# Altium PCB temperature_controller.PcbDoc
Units mm, origin at the board's own origin, x right, y up, seen from the top; angles counter-clockwise.
Board outline 47 x 53 mm, 2 copper layers (Top Layer, Bottom Layer); 94 components, 44 nets, 284 pads, 137 vias.
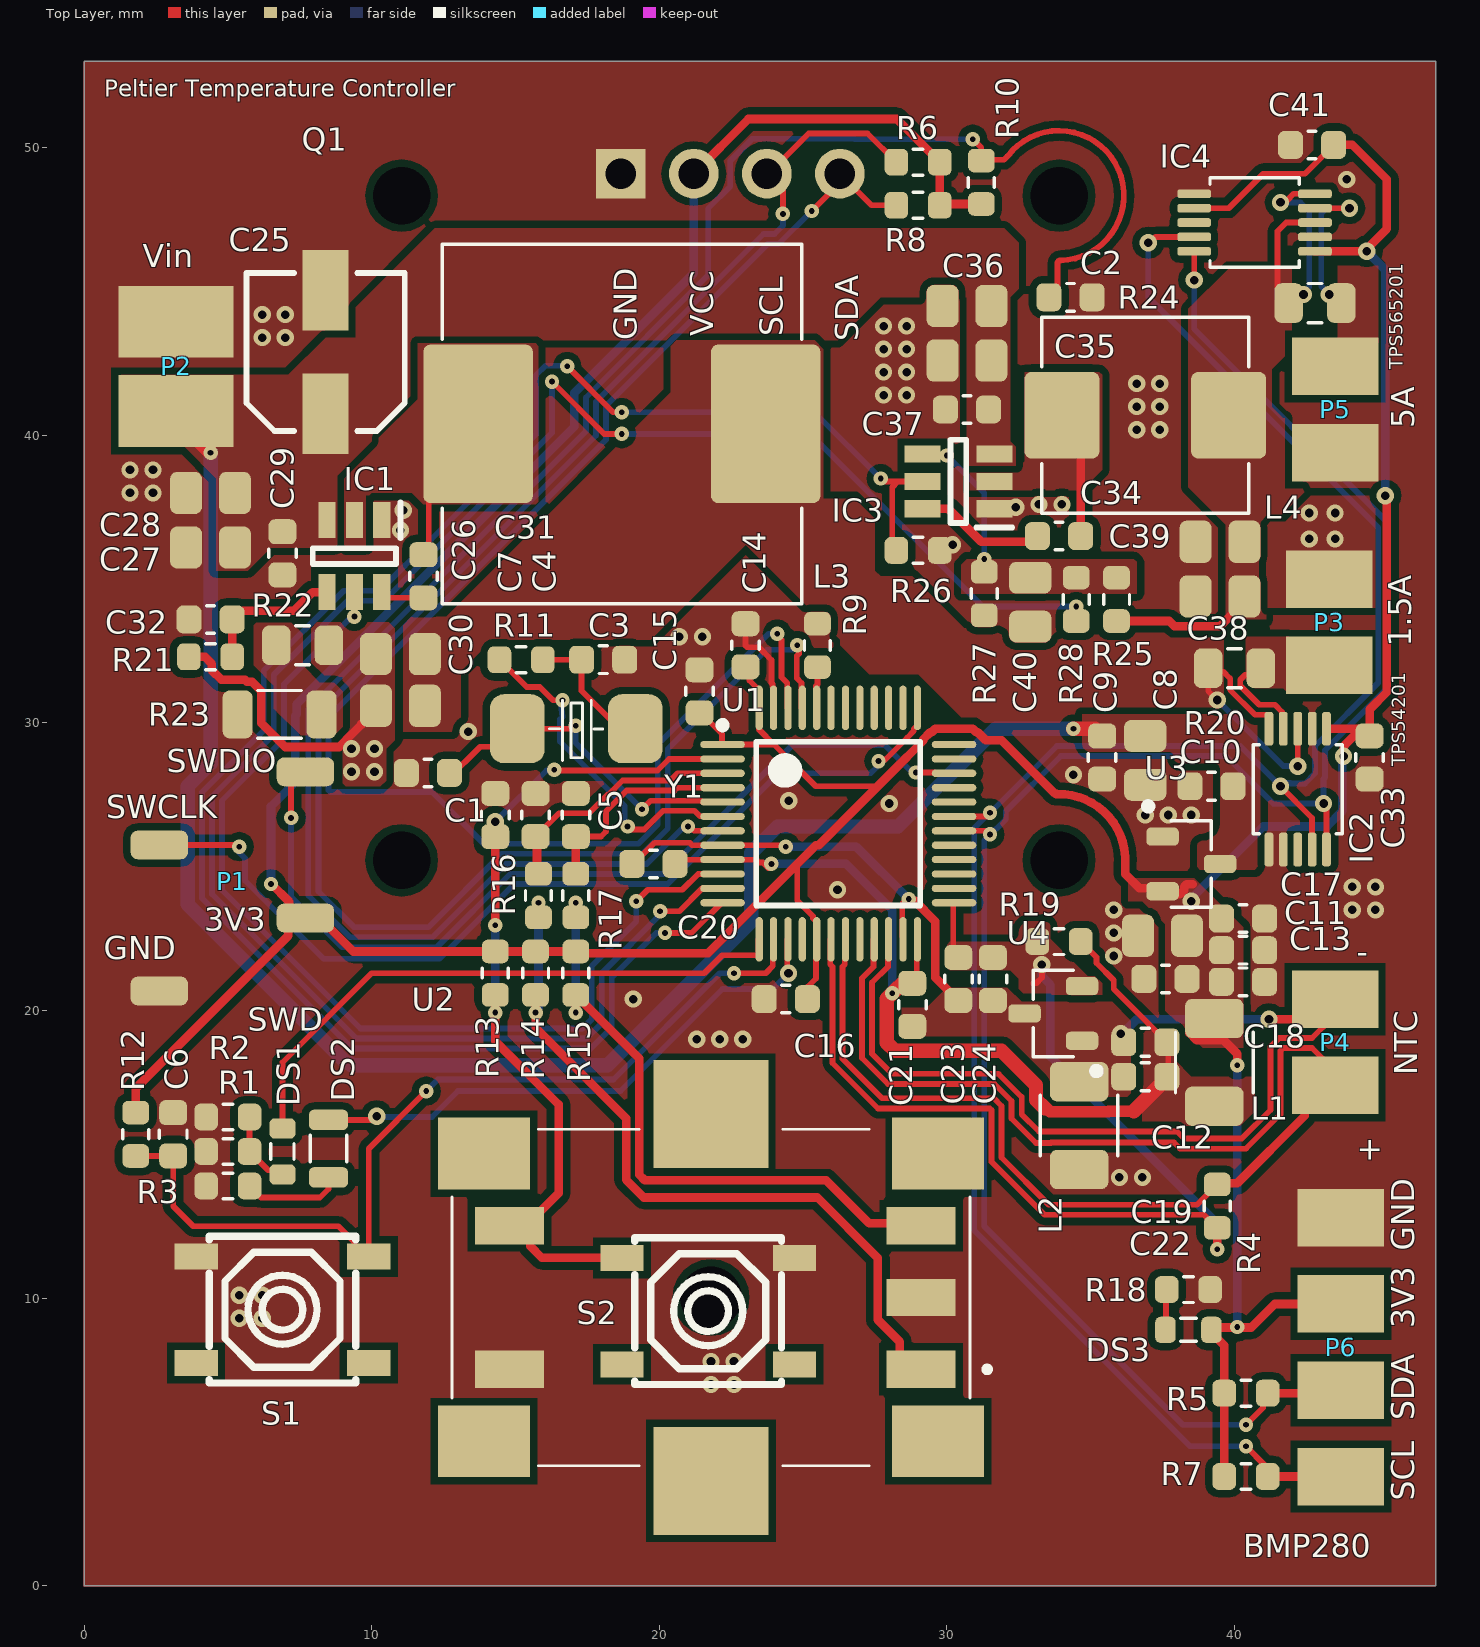
[diagram p0: Top Layer view]
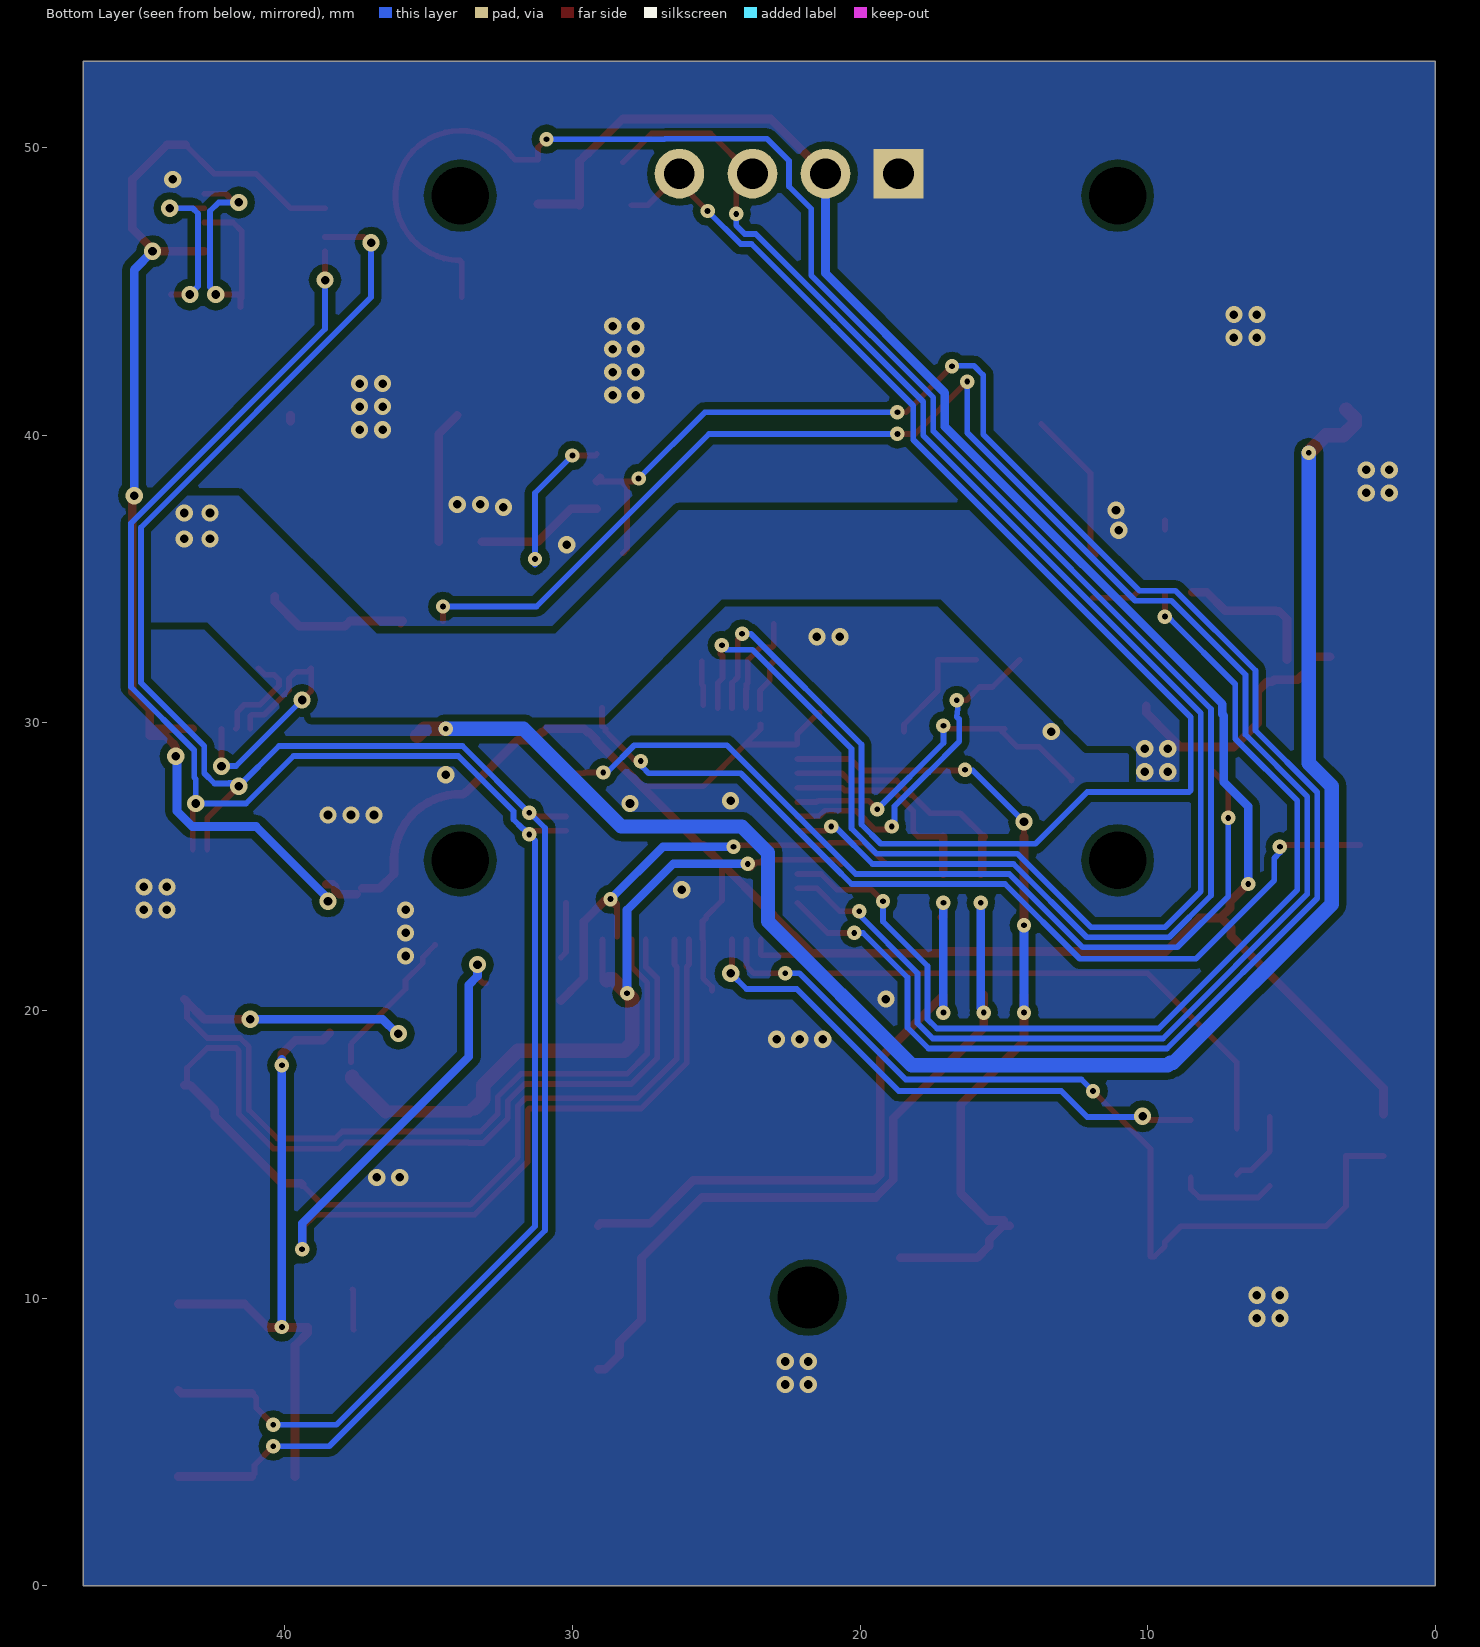
[diagram p1: Bottom Layer view, seen from below]

## Layer stack, top to bottom
Top Solder: solder mask 0.0102, Solder Resist, Dk 3.5
Top Layer: signal copper 0.0356
Dielectric 1: dielectric 0.32, FR-4, Dk 4.8
Bottom Layer: signal copper 0.0356
Bottom Solder: solder mask 0.0102, Solder Resist, Dk 3.5

## Board outline
0,0 0,53 47,53 47,0

## Design rules (kind name [scope] priority, off if disabled: settings)
Clearance [All] p1: gap=0.25 ignorepadtopadclearanceinfootprint=FALSE except(0: Arc-Hole Track-Hole SMDPad-Hole THPad-Hole Via-Hole Fill-Hole Poly-Hole Region-Hole Text-Hole; 0.15: Arc-Arc Arc-Track Arc-SMDPad Track-Track Track-SMDPad; 0.2: Arc-Via Track-Via SMDPad-SMDPad; 0.5: THPad-THPad)
HoleSize [All] p1: absolutevalues=TRUE maxlimit=6.3 minlimit=0.2 maxpercent=80.000 minpercent=20.000
MinimumAnnularRing [All] p1: minimumring=0.13
MinimumSolderMaskSliver [All] p1 off: minsoldermaskwidth=0.254
PolygonConnect [All] p1: connectstyle=Direct reliefconductorwidth=0.254 reliefentries=4 polygonreliefangle="90 Angle" airgapwidth=0.254
RoutingVias [All] p1: holewidth=0.3 width=0.6 viastyle="Through Hole" minholewidth=0.2 minwidth=0.45 maxholewidth=6.3 maxwidth=6.7
SilkToSilkClearance [All] p1: silktosilkclearance=0.15
SilkToSolderMaskClearance [IsPad] p1: minsilkscreentomaskgap=0.15 clearancetoexposedcopper=TRUE
SolderMaskExpansion [All] p1: expansion=0.102 istentingtop=FALSE useseparateexpansions=TRUE expansionbottom=0.102 istentingbottom=TRUE
Width [All] p1: maxlimit=5 minlimit=0.15 preferedwidth=0.3 minimp=50.000000 maximp=50.000000 favimp=50.000000
26 further rules are at their usual default settings.

## Components (designator, comment, footprint, x,y, rotation, side; value= is the part's Value field where it differs from the comment)
C1 "20pf" CAPC160X80X90L35N 11.956,28.263 r180 top
C2 "100nF" CAPC160X80X90L35N 34.3,44.8 r0 top
C3 "20pf" CAPC160X80X90L35N 18.05,32.2 r0 top
C4 "10nF" CAPC160X80X90L35N 15.7,26.8 r90 top
C5 "10nF" CAPC160X80X90L35N 17.1,26.8 r90 top
C6 "10nF" CAPC160X80X90L35N 3.1,15.7 r90 top
C7 "10nF" CAPC160X80X90L35N 14.3,26.8 r90 top
C8 "22uF" CAPC200X125X110L50N 36.9,28.7 r270 top
C9 "1uF" CAPC160X80X90L35N 35.4,28.8 r270 top
C10 "100nF" CAPC160X80X90L35N 39.2,27.8 r180 top
C11 "100nF" CAPC160X80X90L35N 40.3,22.1 r0 top
C12 "1uF" CAPC160X80X90L35N 37.6,21.1 r180 top
C13 "22uF" CAPC200X125X110L50N 37.5,22.6 r180 top
C14 "100nF" CAPC160X80X90L35N 23,32.7 r90 top
C15 "100nF" CAPC160X80X90L35N 21.4,31.1 r90 top
C16 "100nF" CAPC160X80X90L35N 24.4,20.4 r180 top
C17 "10nF" CAPC160X80X90L35N 40.3,23.2 r0 top
C18 "100nF" CAPC160X80X90L35N 40.3,21 r0 top
C19 "1uF" CAPC160X80X90L35N 36.9,18.9 r180 top
C20 "100nF" CAPC160X80X90L35N 19.8,25.1 r180 top
C21 "100nF" CAPC160X80X90L35N 28.8,20.2 r270 top
C22 "10nF" CAPC160X80X90L35N 36.9,17.7 r180 top
C23 "1uF" CAPC160X80X90L35N 30.4,21.1 r270 top
C24 "10nF" CAPC160X80X90L35N 31.6,21.1 r270 top
C25 "#NAME?" PNSC-FP-V-C_V 8.4,42.9 r90 top value=22uF
C26 "100nF" CAPC160X80X90L35N 11.8,35.1 r90 top
C27 "22uF" CAPC200X125X110L50N 4.4,36.1 r180 top
C28 "10uF" CAPC200X125X110L50N 4.4,38 r180 top
C29 "100nF" CAPC160X80X90L35N 6.9,35.9 r270 top
C30 "22uF" CAPC200X125X110L50N 11,32.4 r180 top
C31 "22uF" CAPC200X125X110L50N 11,30.6 r180 top
C32 "100nF" CAPC160X80X90L35N 4.4,33.6 r0 top
C33 "100nF" CAPC160X80X90L35N 44.7,28.8 r270 top
C34 "100nF" CAPC160X80X90L35N 33.9,36.5 r0 top
C35 "22uF" CAPC200X125X110L50N 30.7,42.6 r180 top
C36 "10uF" CAPC200X125X110L50N 30.7,44.5 r180 top
C37 "100nF" CAPC160X80X90L35N 30.7,40.9 r180 top
C38 "22uF" CAPC200X125X110L50N 39.5,34.4 r180 top
C39 "22uF" CAPC200X125X110L50N 39.5,36.3 r180 top
C40 "22uF" CAPC200X125X110L50N 32.9,34.2 r90 top
C41 "100nF" CAPC160X80X90L35N 42.7,50.1 r180 top
DS1 "19-217/GHC-YR1S2/3T" LEDC160X80X60L30N 6.9,15.1 r90 top
DS2 "FC-2012HRK-620D" LEDC200X125X110L30N 8.5,15.2 r90 top
DS3 "19-217/GHC-YR1S2/3T" LEDC160X80X60L30N 38.4,8.9 r0 top
IC1 "TPS54201DDCR" SOT95P280X110-6N 9.4,35.8 r270 top
IC2 "INA226AIDGSR" SOP10P50_300X490X110L55X22N 42.2,27.7 r0 top
IC3 "TPS565201DDCR" SOT95P280X110-6N 30.4,38.4 r180 top
IC4 "INA226AIDGSR" SOP10P50_300X490X110L55X22N 40.7,47.4 r270 top
L1 "100uH" INDM320X250X240L55X190N 39.3,18.2 r270 top
L2 "100uH" INDM320X250X240L55X190N 34.6,16 r90 top
L3 "68uH" INDM1250X1250X800L290X540N 18.7,40.4 r0 top
L4 "3.3uH" INDM730X660X300L160X290N 36.9,40.7 r0 top
P1 "SWD" SWD 2.62,20.68 r0 top
P2 "TWO PADS" "TWO PADS - medium" 3.2,42.4 r0 top value=1uF
P3 "TWO PADS for TEC" "TWO PADS" 43.3,32 r180 top value=1uF
P4 "NTC" "TWO PADS" 43.5,20.4 r0 top value=1uF
P5 "TWO PADS for TEC" "TWO PADS" 43.5,42.4 r0 top value=1uF
P6 "PADS for BMP" "FOUR PADS" 43.7,12.8 r0 top value=1uF
Q1 "SSD1306 OLED_big" "SSD1306 OLED" 18.66,49.1 r0 top
R1 "180" RESC160X80X90L30N 5,15.1 r0 top
R2 "180" RESC160X80X90L30N 5,16.3 r0 top
R3 "180" RESC160X80X90L30N 5,13.9 r0 top
R4 "10k" RESC160X80X90L30N 39.4,13.2 r270 top
R5 "1.8k" RESC160X80X90L30N 40.4,6.7 r0 top
R6 "1.8k" RESC160X80X90L30N 29,49.5 r0 top
R7 "1.8k" RESC160X80X90L30N 40.4,3.8 r0 top
R8 "1.8k" RESC160X80X90L30N 29,48 r0 top
R9 "10k" RESC160X80X90L30N 25.5,32.7 r90 top
R10 "10k" RESC160X80X90L30N 31.2,48.8 r270 top
R11 "180" RESC160X80X90L30N 15.2,32.2 r0 top
R12 "10k" RESC160X80X90L30N 1.8,15.7 r270 top
R13 "10k" RESC160X80X90L30N 14.3,21.3 r270 top
R14 "10k" RESC160X80X90L30N 15.7,21.3 r270 top
R15 "10k" RESC160X80X90L30N 17.1,21.3 r270 top
R16 "10k" RESC160X80X90L30N 15.8,24 r90 top
R17 "10k" RESC160X80X90L30N 17.1,24 r90 top
R18 "180" RESC160X80X90L30N 38.4,10.3 r180 top
R19 "10k" RESC160X80X90L30N 33.9,22.4 r0 top
R20 "0.033" RESC200X125X70L40N 40,31.9 r0 top
R21 "820" RESC160X80X90L30N 4.4,32.3 r180 top
R22 "0.033" RESC200X125X70L40N 7.6,32.7 r0 top
R23 "0.1" RESC310X152X65L45N 6.8,30.3 r0 top
R24 "0.01" RESC200X125X70L40N 42.8,44.6 r0 top
R25 "75k" RESC160X80X90L30N 35.9,34.3 r90 top
R26 "10k" RESC160X80X90L30N 29,36 r0 top
R27 "10k" RESC160X80X90L30N 31.3,34.5 r90 top
R28 "10k" RESC160X80X90L30N 34.5,34.3 r270 top
S1 "Switch" "Tactile switch" 6.9,9.6 r0 top
S2 "Switch" "Tactile switch" 21.7,9.55 r0 top
U1 "STM32F373CCT6" STM-LQFP48_L 26.225,26.5 r270 top
U2 "EC11J0924411" EC11J0924411 21.8,10.025 r90 top
U3 "MCP1703AT-3302E/CB" SOT-23A-CB3_M 38.5,25.1 r180 top
U4 "LM4041C12IDBZR" SOT-23A-CB3_M 33.7,19.9 r0 top
Y1 "8Mhz" 5032 17.1,29.8 r0 top

## Footprints (in the part's own frame and the unit in brackets; to place one, negate y for a bottom-side part, rotate by r counter-clockwise, add the part's x,y. Pads: shape width x height; smd on the part's side, far side on the other; paste and mask are expansions set on the pad)
5032 [mm]
  rrect50% 1.9x2.4 smd: 1(-2.032,0) 2(2.068,0)
  silkscreen extent -0.92,-1.11 0.94,0.99
CAPC160X80X90L35N [mm] "Capacitor, Chip; 1.60 mm L X 0.80 mm W X 0.90 mm H body"
  rrect51% 0.87x0.97 smd: 1(-0.75,0) 2(0.75,0)
  silkscreen extent -0.14,-0.48 0.14,0.48, body extent -0.8,-0.4 0.8,0.4, height 0.9
CAPC200X125X110L50N [mm] "Capacitor, Chip; 2.00 mm L X 1.25 mm W X 1.10 mm H body"
  rrect45% 1.11x1.47 smd: 1(-0.85,0) 2(0.85,0)
  body extent -1,-0.62 1,0.63, height 1.1
EC11J0924411 [mm]
  round 1.075 hole 2.15 unplated: 6(0,0)
  rect 2.5x3.2 smd: 7(-5,-7.9) 8(5,-7.9) 9(5,7.9) 10(-5,7.9)
  rect 3.75x4 smd: 11(-6.375,0) 12(6.375,0)
  rect 1.3x2.4 smd: A1(-2.5,-7.3) B1(2.5,-7.3) C1(0,-7.3) D1(-2.5,7) E1(2.5,7)
  silkscreen extent -5.85,-9.7 5.85,9, body extent -7.88,-9.25 7.88,9.25, height 24.6
"FOUR PADS" [mm]
  rect 3x2 smd: 3V3(0,-3) GND(0,0) SCL(0,-6) SDA(0,-9)
INDM320X250X240L55X190N [mm] "Inductor, Molded Body; 2.10 mm L X 2.50 mm W X 2.40 mm H body"
  rrect36% 1.37x2.03 smd: 1(-1.525,0) 2(1.525,0)
  silkscreen extent -1.05,-1.35 1.05,1.35, body extent -1.6,-1.25 1.6,1.25, height 2.4
INDM730X660X300L160X290N [mm] "Inductor, Molded Body; 7.20 mm L X 6.60 mm W X 3.00 mm H body"
  rrect19% 2.61x3.01 smd: 1(-2.9,0) 2(2.9,0)
  silkscreen extent -3.6,-3.4 3.6,3.4, body extent -3.65,-3.3 3.65,3.3, height 3
INDM1250X1250X800L290X540N [mm] "Inductor, Molded Body; 12.50 mm L X 12.50 mm W X 8.00 mm H body"
  rrect13% 3.81x5.51 smd: 1(-5,0) 2(5,0)
  silkscreen extent -6.25,-6.25 6.25,6.25, body extent -6.25,-6.25 6.25,6.25, height 8
LEDC160X80X60L30N [mm] "LED, Chip; 0603; 1.60 mm L X 0.80 mm W X 0.60 mm H body, green"
  rrect51% 0.71x0.91 smd: A(0.8,0) C(-0.8,0)
  silkscreen extent -0.27,-0.4 0.27,0.4, body extent -0.8,-0.4 0.8,0.4, height 0.95
LEDC200X125X110L30N [mm] "LED, Chip; 2.00 mm L X 1.25 mm W X 1.10 mm H body"
  rrect51% 0.71x1.36 smd: A(1,0) C(-1,0)
  silkscreen extent -0.47,-0.63 0.47,0.63, body extent -1,-0.62 1,0.63, height 1.45
PNSC-FP-V-C_V [mm] "CAPAE, 2-Leads, Body 5.50x5.50mm"
  rect 2.8x1.6 smd: 1(-2.15,0) 2(2.15,0)
  silkscreen extent -2.75,-2.75 2.75,2.75, body extent -3.25,-2.75 3.25,2.75, height 6.1
RESC160X80X90L30N [mm] "Resistor, Chip; 1.60 mm L X 0.80 mm W X 0.90 mm H body"
  rrect51% 0.82x0.93 smd: 1(-0.755,0) 2(0.755,0)
  silkscreen extent -0.17,-0.45 0.17,0.45, body extent -0.8,-0.4 0.8,0.4, height 0.9
RESC200X125X70L40N [mm] "Resistor, Chip; 2.00 mm L X 1.25 mm W X 0.70 mm H body"
  rrect51% 0.99x1.38 smd: 1(-0.915,0) 2(0.915,0)
  silkscreen extent -0.24,-0.68 0.24,0.68, body extent -1,-0.62 1,0.63, height 0.7
RESC310X152X65L45N [mm] "Resistor, 1206; Chip; 3.10 mm L X 1.525 mm W X 0.65 mm H body"
  rrect48% 1.05x1.67 smd: 1(-1.46,0) 2(1.46,0)
  silkscreen extent -0.75,-0.83 0.75,0.83, body extent -1.55,-0.76 1.55,0.76, height 0.65
SOP10P50_300X490X110L55X22N [mm] "Small Outline Pkg (SOP), 0.50 mm pitch; 10 pin, 3.00 mm L X 3.00 mm W X 1.10 mm H body"
  rrect53% 0.3x1.17 smd: 1(-1,-2.1) 2(-0.5,-2.1) 3(0,-2.1) 4(0.5,-2.1) 5(1,-2.1) 6(1,2.1) 7(0.5,2.1) 8(0,2.1) 9(-0.5,2.1) 10(-1,2.1)
  silkscreen extent -1.55,-1.55 1.55,1.55, body extent -1.5,-2.45 1.5,2.45, height 1.1
SOT95P280X110-6N [mm]
  rect 1.25x0.6 smd: 1(-1.25,0.95) 2(-1.25,0) 3(-1.25,-0.95) 4(1.25,-0.95) 5(1.25,0) 6(1.25,0.95)
  silkscreen extent -1.88,-1.45 0.28,1.6, body extent -1.4,-1.45 1.4,1.45, height 1.1
SOT-23A-CB3_M [mm]
  rrect51% 1.13x0.63 smd: 1(1,-0.95) 2(1,0.95) 3(-1,0)
  silkscreen extent -0.7,-2.12 1.62,1.5, body extent -1.2,-1.45 1.2,1.45, height 1.1
"SSD1306 OLED" [mil]
  round 75 hole 78.74 unplated: 2(-300,-940) 2(-300,-30) 2(600,-940) 2(600,-30)
  rect 68x68 hole 42: GND(0,0)
  round 68 hole 42: SCL(200,0) SDA(300,0) VCC(100,0)
  body extent -387,-1034 687,60, height 516
STM-LQFP48_L [mm]
  oval 0.25x1.55 smd: 1(-2.75,-4.025) 2(-2.25,-4.025) 3(-1.75,-4.025) 4(-1.25,-4.025) 5(-0.75,-4.025) 6(-0.25,-4.025) 7(0.25,-4.025) 8(0.75,-4.025) 9(1.25,-4.025) 10(1.75,-4.025) 11(2.25,-4.025) 12(2.75,-4.025) 25(2.75,4.025) 26(2.25,4.025) 27(1.75,4.025) 28(1.25,4.025) 29(0.75,4.025) 30(0.25,4.025) 31(-0.25,4.025) 32(-0.75,4.025) 33(-1.25,4.025) 34(-1.75,4.025) 35(-2.25,4.025) 36(-2.75,4.025)
  oval 1.55x0.25 smd: 13(4.025,-2.75) 14(4.025,-2.25) 15(4.025,-1.75) 16(4.025,-1.25) 17(4.025,-0.75) 18(4.025,-0.25) 19(4.025,0.25) 20(4.025,0.75) 21(4.025,1.25) 22(4.025,1.75) 23(4.025,2.25) 24(4.025,2.75) 37(-4.025,2.75) 38(-4.025,2.25) 39(-4.025,1.75) 40(-4.025,1.25) 41(-4.025,0.75) 42(-4.025,0.25) 43(-4.025,-0.25) 44(-4.025,-0.75) 45(-4.025,-1.25) 46(-4.025,-1.75) 47(-4.025,-2.25) 48(-4.025,-2.75)
  silkscreen extent -3.55,-4.15 2.85,2.85, body extent -3.5,-3.5 3.5,3.5, height 1.6
SWD [mm] "SWD PORT"
  rrect50% 2x1 smd: 3V3(5.08,2.54) GND(0,0) SWCLK(0,5.08) SWDIO(5.08,7.62)
"Tactile switch" [mm]
  rect 1.5x0.9 smd: 1(-3,1.85) 2(3,1.85) 3(-3,-1.85) 4(3,-1.85)
  silkscreen extent -2.55,-2.55 2.55,2.55
"TWO PADS" [mm]
  rect 3x2 smd: 1(0,0) 2(0,-3)
"TWO PADS - medium" [mm] "4.00 mm x 2.50 mm, 0.50 mm space"
  rect 4x2.5 smd: 1(0,1.55) 2(0,-1.55)

## Part data
C1 C3: library part capacitor, LCSC Part #=C1648, Part Number=CL10C200JB8NNNC
C2 C10 C11 C14 C15 C16 C18 C20 C21 C26 C29 C32 C33 C34 C37 C41: library part capacitor, LCSC Part #=C14663, Part Number=CC0603KRX7R9BB104
C4 C5 C6 C7 C17 C22 C24: library part capacitor, LCSC Part #=C57112, Part Number=0603B103K500NT
C8 C13 C27 C30 C31 C35 C38 C39 C40: library part capacitor, LCSC Part #=C45783, Part Number=CL21A226MAQNNNE
C9 C12 C19 C23: library part capacitor, LCSC Part #=C15849, Part Number=CL10A105KB8NNNC
C25: library part CMP-2000-06213-1, "Aluminum Electrolytic Capacitor, 22 uF, +/- 20%, 25 V, 2-Pin SMD (Size Code C), -55 to 105 degC, RoHS, Tape and Reel", Capacitance=22µF, Case Size/Dimension=Ø5x5.8mm, ESR (Equivalent Series Resistance)=0.36O, LCSC Part #=C249771, Lifetime@Temperature=2000Hrs@105°C, Manufacturer=Panasonic, Operating Temp Range=-55to+105°C, Operating Temp-Max=105°C, Package Description="2-Pin Electrolytic Aluminum Capacitor, Body 5.3 x 5.3 mm", Package Reference=FP-V-C, Rated Voltage=25V, Ripple Current=240mA, Datasheet URL=http://industrial.panasonic.com/cdbs/www-data/pdf/RDE0000/ABA0000C1184.pdf, Datasheet Version=03/2016, Manufacturer URL=http://www.panasonic.com/, Mounting Technology=SurfaceMount, Package URL=http://industrial.panasonic.com/cdbs/www-data/pdf/RDE0000/DME0000COL48.pdf, Series=FP, Type=Can, Voltage=25V
C28 C36: library part capacitor, LCSC Part #=C15850, Part Number=CL21A106KAYNNNE
DS1 DS3: library part LED, "Green LED", LCSC Part #=C72043, Part Number=19-217/GHC-YR1S2/3T
DS2: library part "RED LED", "Red LED", LCSC Part #=C84256, Package=0805, Part Number=FC-2012HRK-620D
IC1: library part TPS54201DDCR_1, "Integrated Circuit", Manufacturer_Name="Texas Instruments", Mouser2 Part Number=595-TPS54201DDCR, Part Number=TPS54201, Datasheet Link=http://www.ti.com/lit/gpn/TPS54201, Height=1.1mm, Manufacturer_Part_Number=TPS54201DDCR, Mouser2 Price/Stock=https://www.mouser.com/Search/Refine.aspx?Keyword=595-TPS54201DDCR
IC2 IC4: "Integrated Circuit", LCSC Part #=C49851, Manufacturer_Name="Texas Instruments", Mouser2 Part Number=595-INA226AIDGSR, Datasheet Link=https://componentsearchengine.com/Datasheets/1/INA226AIDGSR.pdf, Height=1.1mm, Manufacturer_Part_Number=INA226AIDGSR, Mouser2 Price/Stock=https://www.mouser.com/Search/Refine.aspx?Keyword=595-INA226AIDGSR
IC3: "Integrated Circuit", Manufacturer_Name="Texas Instruments", Datasheet Link=http://www.ti.com/lit/gpn/tps565201, Height=1.1mm, Manufacturer_Part_Number=TPS565201DDCR
L1 L2: library part Inductor, "Inductor", LCSC Part #=C76836, Part Number=NLV32T-101J-PF
L3: library part Inductor, "Inductor", LCSC Part #=C169377, Part Number=SWRB1207S-680MT, Resistance=0.14
L4: library part Inductor, "Inductor", LCSC Part #=C280586, Part Number=MHCI06030-3R3M-R8A, Resistance=22mOhm
P1: library part "SWD port"
P4: library part "TWO PADS for NTC"
Q1: "I2C display"
R1 R2 R3 R11 R18: library part Resistor, LCSC Part #=C22828, Part Number=0603WAF1800T5E
R4 R9 R10 R12 R13 R14 R15 R16 R17 R19: library part Resistor, LCSC Part #=C25804, Part Number=0603WAF1002T5E
R5 R6 R7 R8: library part Resistor, LCSC Part #=C4177, Part Number=0603WAF1801T5E
R20: library part Resistor, LCSC Part #=C127689, Package=Package0805, Megjegyzes="Eredetileg ez egy: 0805, 0.05ohm, 0805W8F500MT5E"
R21: library part Resistor, LCSC Part #=C23253, Part Number=0603WAF8200T5E
R22: library part Resistor, LCSC Part #=C127689, Package=0805, Part Number=0805W8F330MT5E
R23: library part Resistor, LCSC Part #=C25334, Package=1206, Part Number=1206W4F100LT5E
R24: library part Resistor, LCSC Part #=C127689, Package=1206, Part Number=1206W4F100MT5E, Alternatives="0805W4F100MT5E, 1206W4F100MT5E", Megjegyzes="Eredetileg ez egy: 1206, 0.01ohm, 1206W4F100MT5E"
R25: library part Resistor, LCSC Part #=C46216, Package=0805, Part Number=0603WAF7502T5E
R26 R27 R28: library part Resistor, LCSC Part #=C25804, Package=0603, Part Number=0603WAF1002T5E
S1 S2: Part Number=TS-1187A-C-E-B, C57112=C318887, LatestRevisionDate=17-Jul-2002, LatestRevisionNote="Re-released for DXP Platform.", PackageDescription="Switch; 2 Leads", PackageReference=SPST-2, Published=24-Mar-1999, Publisher="Altium Limited"
U1: "ARM Cortex-M4 32-bit MCU, 256 KB Flash, 32 KB Internal RAM, 36 I/Os, 48-pin LQFP, -40 to 85 degC, Tray", I/Os (High Current)=36, LCSC Part #=C89403, Manufacturer=STMicroelectronics, Operating Frequency(F) (Processor speed) (MHz)=72, Supply Voltage(Vcc) min (V)=2, ComponentLink1Description="Manufacturer URL", ComponentLink1URL=http://www.st.com/web/en/home.html, ComponentLink2Description=Datasheet, ComponentLink2URL=http://www.st.com/st-web-ui/static/active/en/resource/technical/document/datasheet/DM00046749.pdf, ComponentLink3Description="Package Specification", ComponentLink3URL=http://www.st.com/st-web-ui/static/active/en/resource/technical/document/datasheet/DM00058181.pdf, Core="ARM Cortex-M4", DatasheetVersion="Rev. 3", FLASH Size (Prog) (kB)=256, Internal RAM Size (kB)=32, Manufacturer Part Number=STM32F373CCT6, Mounting Technology="Surface Mount", PackageDescription="48-Pin Low Profile Quad Flat Package, 7 x 7 mm Body, 0.5 mm Pitch", PackageReference=LQFP48, PackageVersion="Rev. 6, 06/2013", Packing=Tray, PartNumber=STM32F373CCT6
U2: "Rotary encoder", Manufacturer_Name=ALPS, Mouser2 Part Number=688-EC11J0924411, Datasheet Link=https://componentsearchengine.com//EC11J0924411.pdf, Height=24.5mm, Manufacturer_Part_Number=EC11J0924411, Mouser2 Price/Stock=https://www.mouser.com/Search/Refine.aspx?Keyword=688-EC11J0924411
U3: library part CMP-0136-00758-1, LCSC Part #=C144183, Part Number=MCP1703, DatasheetVersion="revD, Sep-2009", PackageDescription="3-Lead Plastic Small Outline Transistor (CB) [SOT-23A]", PackageReference=SOT-23A-CB3, PackageVersion="revBB, Aug-2009"
U4: library part LMZ4041C12IDBZR, "Precision Micropower Shunt Voltage Reference, 0.5% accuracy, 1.2 V, 15 ppm / degC, 12 mA, -40 to 85 degC, 3-pin SOT-23 (DBZ), Green (RoHS & no Sb/Br)", LCSC Part #=C133587, Manufacturer="Texas Instruments", Rating=Catalog, Temp Coeff(Max)(ppm/ degree C)=100, Temp Coeff(Typ)(ppm/ degree C)=15, Code_JEDEC=TO-236, ComponentLink1Description="Manufacturer URL", ComponentLink1URL=http://www.ti.com/, ComponentLink2Description=Datasheet, ComponentLink2URL=http://www.ti.com/general/docs/lit/getliterature.tsp?genericPartNumber=LM4041C12&fileType=pdf, ComponentLink3Description="Package Specification", ComponentLink3URL=http://www.ti.com/litv/pdf/mpds108a, ComponentLink4Description="URL Link1", ComponentLink4URL="Samples URL:http://www.ti.com/product/lm4041c12", DatasheetVersion=SLCS146E, Eco-Plan="Green (RoHS & no Sb/Br)", Initial Accuracy @ 25/deg C(%)=0.5, Iout/Iz(Max)(mA)=12, Min Iz for Regulation(uA)=60, Mounting Technology="Surface Mount", PackageDescription="3-Pin Plastic Small Outline, Body 2.92 x 1.3 mm, Pitch 0.95 mm", PackageReference=DBZ0003A, PackageVersion=4203227/B, PartNumber=LM4041C12IDBZR, SubFamily="Shunt Voltage Reference", VO(V)=1.225
Y1: library part XTAL, "Crystal Oscillator", LCSC Part #=C115962, Part Number=X50328MSB2GI, LatestRevisionDate=17-Jul-2002, LatestRevisionNote="Re-released for DXP Platform.", PackageDescription="Crystal, Thru-Hole; 2 Leads; Body 3.1 x 8.2 mm (Dia.xH)", PackageReference=R38, Published=8-Jun-2000, Publisher="Altium Limited"

## Via types
v1: diameter 0.6, hole 0.3, Top Layer to Bottom Layer, tented bottom, 88 vias
v2: diameter 0.5, hole 0.2, Top Layer to Bottom Layer, tented bottom, 49 vias

## Nets (pads, with @x,y where several pads share a name; then routed paths per layer and width w, separated by ;. In a path a pad name is that pad's centre, name@x,y a point inside that pad or via, vN(x,y) a via of type N, cw(c..) or ccw(c..) an arc to the next point about the centre after c; other vN are vias at no path point)
3V3: C11.1 C12.1 C13.1 C14.1 C15.1 C16.1 C17.1 C18.1 C33.1 C41.1 DS3.A IC2.6 IC4.2 IC4.6 L1.1 P1.3V3 P6.3V3 Q1.VCC R5.1 R6.2 R7.1 R8.2 R10.2 R12.1 R13.1 R14.1 R15.1 U1.1 U1.17 U1.48 U3.2 | length 172.4
  Top Layer w0.2: C15.1 21.45,30.35 22.184,29.616 22.184,29.273 22.207,29.25 23.995,29.25 ; C14.1@23,32.15 23.141,32.009 23.141,31.474 23.4,31.215 23.4,31.209 23.475,31.134 U1.48@23.475,30.475 ; U1.48@23.46,29.952 23.46,29.785 23.995,29.25 ; 24.8,25.1 24.8,23.83 25.35,23.28 25.35,23.209 25.424,23.135 25.452,23.135 25.475,23.111 U1.17 ; C16.1@25.15,20.7 25.15,20.816 25.45,21.116 U1.17@25.45,22.425 ; 27.599,27.8 25.445,27.8 23.995,29.25 ; IC4.2 39.8,47.9 41,49.1 42.45,49.1 C41.1
  Top Layer w0.3: R12.1@1.8,16.4 1.8,17.3 7.1,22.6 7.1,22.878 7.442,23.22 P1.3V3@7.48,23.22 ; v2(6.5,24.4) 6.5,24.42 7.138,23.782 7.138,23.562 P1.3V3@7.48,23.22 ; Q1.VCC 23.1,51 28.255,51 29.44,49.815 29.463,49.815 29.755,49.523 R6.2 R8.2 29.8,48.045 R10.2 ; 23.025,23.325 21.7,22 17.155,22 R15.1 R14.1 R13.1 9.365,22.055 8.2,23.22 P1.3V3 P1.3V3@7.48,23.22 ; 23.026,23.325 23.275,23.574 ; 23.275,23.575 24.8,25.1 25.45,25.75 25.549,25.75 27.599,27.8 28.099,28.301 ; U3.2@37.3,24.25 36.7,24.25 36.202,24.748 36.202,25.1 ccw(c33.9,25.224) 33.838,27.528 cw(c33.834,27.678) 33.728,27.572 33.6,27.7 31.9,29.4 31.351,29.4 31.076,29.675 31.026,29.675 30.901,29.8 29.599,29.8 29.474,29.675 29.424,29.675 29.175,29.426 29.175,29.376 ; U3.2@37.5,24.044 38.1,24.044 38.25,24.194 38.25,24.306 38.338,24.394 38.552,24.394 ; L1.1@38.437,19.219 38.684,18.972 39.628,18.972 40.1,18.5 v2(40.1,18.1) ; DS3.A 39.2,8.8 39.645,8.355 R5.1 R7.1 ; DS3.A@39.2,8.983 39.963,8.983 40.008,8.938 40.055,8.938 40.1,8.983 40.583,8.983 41.4,9.8 P6.3V3 ; v2@40.1,8.9 v2(40.1,9) ; IC4.6 43.276,46.4 v1(44.6,46.4) 44.6,46.481 45.3,47.181 45.3,48.9 44.1,50.1 C41.1 ; IC2.6 44.277,29.8 44.286,29.791 44.459,29.791 C33.1 ; v1(43.794,28.844) 43.8,28.85 43.8,29.1 cw(c44.041,29.1) 43.871,29.271 44.15,29.55 C33.1 ; v1(45.239,37.905) 45.296,37.847 45.296,37.67 45.3,37.667 45.3,31.076 44.7,30.476 C33.1 ; 28.099,28.301 29.175,29.376 ; 28.099,28.301 29.175,29.376
  Bottom Layer w0.3: v2(6.5,24.4) 6.5,27.1 7.35,27.95 7.35,30.25 7.4,30.3 7.4,30.656 17.05,40.306 17.05,41.483 21.2,45.633 Q1.VCC ; v1(38.5,23.8) 38.5,23.896 41.004,26.4 43.219,26.4 43.75,26.931 43.75,28.8 v1(43.794,28.844) ; v2(40.1,9) v2@40.1,18.3 ; v1(44.6,46.4) 45.239,45.761 v1(45.239,37.905)
ADC_RES+: C23.1 C24.1 R4.2 R19.1 U1.18 U1.25 U4.2 | length 37.1
  Top Layer w0.2: U1.18@25.95,22.475 25.95,21.6 26.025,21.525 26.025,18.18 27.605,16.6 31.494,16.6 31.553,16.541 31.553,14.747 33.4,12.9 38.945,12.9 R4.2 ; U1.25@30.225,23.75 30.225,22.025 C23.1 ; 33,20.95 33.109,20.95 33.309,21.15 33.309,21.591 v1(33.3,21.6)
  Top Layer w0.3: v2(39.4,11.7) R4.2
  Bottom Layer w0.3: v1(33.3,21.6) 33.3,21.2 33.6,20.9 33.6,18.4 39.4,12.6 v2(39.4,11.7)
EncoderA: C4.1 R16.2 U1.3 | length 8.7
  Top Layer w0.2: C4.1 16.515,26.865 17.559,26.865 17.835,27.141 18.194,27.5 18.227,27.5 18.727,28 20.383,28 20.633,28.25 U1.3@22.175,28.25
  Top Layer w0.3: C4.1 15.75,26 15.75,24.805 R16.2
EncoderB: C5.1 R17.2 U1.4 | length 7.5
  Top Layer w0.2: C5.1 17.972,26.05 18.15,26.228 18.15,26.928 18.872,27.65 20.528,27.65 20.628,27.75 U1.4@22.175,27.75
  Top Layer w0.3: R17.2 C5.1
EncoderButton: C7.1 R13.2 S2.1 U1.2 U2.E1 | length 29.5
  Top Layer w0.2: C7.1 v1(14.3,26.565) ; v2(16.349,28.373) 16.372,28.35 19.943,28.35 20.343,28.75 U1.2@22.175,28.75
  Top Layer w0.3: R13.2 v2(14.3,19.93) 14.3,18.934 16.5,16.734 16.5,13.65 15.55,12.7 U2.E1@15,12.7 ; v2(14.3,22.965) C7.1 ; U2.E1 15.012,12.525 15.512,12.025 15.512,11.813 15.925,11.4 S2.1@18.6,11.4
  Bottom Layer w0.2: v1(14.3,26.565) 16.081,28.346 16.322,28.346 v2(16.349,28.373)
  Bottom Layer w0.3: v2(14.3,19.93) v2(14.3,22.965)
GND: C1.2 C2.2 C3.2 C4.2 C5.2 C6.2 C7.2 C8.2 C9.2 C10.2 C11.2 C12.2 C13.2 C14.2 C15.2 C16.2 C17.2 C18.2 C25.2 C27.2 C28.2 C29.2 C32.1 C33.2 C35.2 C36.2 C37.2 C38.2 C39.2 C40.1 C41.2 IC1.1 IC2.1 IC2.2 IC2.7 IC3.1 IC4.1 IC4.7 L2.1 P1.GND P2.1 P5.2 P6.GND Q1.GND R1.1 R2.1 R3.1 R9.2 R18.1 R23.1 R26.2 R27.1 S1.1 S2.2 U1.47 U2.C1 U2.D1 U3.1 | length 3.5
  Top Layer w0.2: C14.2 23,32.694 23.059,32.635 23.459,32.635 23.9,32.194 23.9,31.4 23.95,31.35 23.95,31.185 23.965,31.17 U1.47@23.965,30.539
  other v1: 21.8,7 22.6,7 21.8,7.8 22.6,7.8 5.4,9.3 6.2,9.3 5.4,10.1 6.2,10.1 36,14.2 36.8,14.2 21.3,19 22.1,19 22.9,19 19.1,20.4 35.8,21.9 35.8,22.7 35.8,23.5 44.1,23.5 44.9,23.5 26.2,24.2 44.1,24.3 44.9,24.3 36.9,26.8 37.7,26.8 38.5,26.8 28,27.2 24.5,27.3 34.4,28.2 13.355,29.7 20.7,33 21.5,33 30.2,36.2 11,36.7 11.1,37.4 32.4,37.5 33.2,37.6 34,37.6 1.6,38 2.4,38 1.6,38.8 2.4,38.8 36.6,40.2 37.4,40.2 36.6,41 37.4,41 27.8,41.4 28.6,41.4 36.6,41.8 37.4,41.8 27.8,42.2 28.6,42.2 27.8,43 28.6,43 6.2,43.4 7,43.4 27.8,43.8 28.6,43.8 6.2,44.2 7,44.2 43.9,48.9
NetC2_1: C2.1 R10.1 U1.7 | length 69.3
  Top Layer w0.2: v2(21,26.4) 21.059,26.4 21.209,26.25 U1.7@22.175,26.25 ; v2(30.9,50.3) 31.194,50.006 31.194,49.584 31.984,49.584 32.1,49.7 ccw(c32.035,49.776) 32.114,49.715 cw(c33.9,48.338) 33.948,46.084 ccw(c33.95,45.984) 33.85,45.984 C2.1@33.85,44.8
  Bottom Layer w0.2: v2(21,26.4) 20.943,26.343 20.81,26.343 19.568,25.1 14.667,25.1 12.117,22.55 9.25,22.55 7.8,24 7.8,30.49 17.45,40.14 17.45,41.318 21.7,45.568 21.7,47.884 22.469,48.652 22.469,49.545 23.237,50.314 26.783,50.314 26.796,50.3 v2(30.9,50.3)
NetC3_1: C3.1 R11.2 Y1.2 | length 4.3
  Top Layer w0.2: R11.2 C3.1 17.3,31.118 18.468,29.95 Y1.2@18.468,29.7
NetC26_1: C26.1 IC1.6 | length 1.6
  Top Layer w0.2: IC1.6 10.55,34.35 C26.1@11.9,34.35
NetC26_2: C26.2 IC1.2 L3.1 | length 5.7
  Top Layer w0.2: IC1.2@9.4,36.725 IC1.2 ; C26.2 11.986,36.036 11.986,38.686 L3.1
NetC32_2: C32.2 IC1.4 R21.1 | length 5.1
  Top Layer w0.3: R21.1@5.153,32.202 5.153,33.597 C32.2 5.15,33.611 5.43,33.891 5.514,33.891 5.523,33.9 7.3,33.9 7.95,34.55 IC1.4
NetC34_1: C34.1 IC3.6 | length 4.5
  Top Layer w0.3: IC3.6 30.05,37.45 31.2,36.3 C34.1@33.15,36.3
NetC34_2: C34.2 IC3.2 L4.1 | length 4.7
  Top Layer w0.3: L4.1 34.65,40.05 C34.2@34.65,36.3
NetC40_2: C40.2 IC3.4 R25.2 R27.2 R28.1 | length 5.2
  Top Layer w0.2: IC3.4 29.2,39.3 v2(30,39.3)
  Bottom Layer w0.2: v2(30,39.3) 31.3,38 v2@31.3,35.5
  other v2: 31.3,35.7
NetDS1_A: DS1.A U1.13 | length 20.9
  Top Layer w0.2: DS1.A 6.9,18.2 10,21.3 21.566,21.3 22.191,21.925 23.427,21.925 23.45,21.948 U1.13@23.45,22.475
NetDS1_C: DS1.C R1.2 R2.2 | length 2.7
  Top Layer w0.2: R2.2 R1.2 6.405,14.45 6.75,14.45 DS1.C
NetDS2_A: DS2.A U1.15 | length 19.3
  Top Layer w0.2: DS2.A 9.943,16.2 10.067,16.324 v1(10.176,16.324) ; U1.15@24.45,22.475 24.45,21.337 v1(24.493,21.295)
  Bottom Layer w0.2: v1(10.176,16.324) 10.2,16.3 12.1,16.3 13,17.2 18.651,17.2 22.201,20.75 23.948,20.75 v1(24.493,21.295)
NetDS2_C: DS2.C R3.2 | length 3.4
  Top Layer w0.2: R3.2 6.155,13.5 8.2,13.5 8.5,13.8 DS2.C
NetDS3_C: DS3.C R18.2 | length 1.4
  Top Layer w0.2: DS3.C 37.623,8.923 37.623,8.978 37.623,10.278 R18.2
NetIC1_5: IC1.5 U1.10 | length 35.4
  Top Layer w0.2: v2(9.4,33.7) IC1.5 ; v2(19.2,23.8) 19.6,24.2 20.803,24.2 21.353,24.75 U1.10@22.175,24.75
  Bottom Layer w0.2: v2(9.4,33.7) 9.319,33.7 9.221,33.603 9.203,33.603 6.95,31.35 6.95,29.45 4.8,27.3 4.8,24.194 9.614,19.38 17.328,19.38 17.65,19.702 17.65,21.55 19.2,23.1 v2(19.2,23.8)
NetIC3_5: IC3.5 R26.1 U1.12 | length 65.1
  Top Layer w0.2: v2(16.8,42.4) 18.4,40.8 v2(18.7,40.8) ; v2(20.2,22.7) 21.125,22.7 U1.12@22.175,23.75 ; v2(27.7,38.5) 27.781,38.5 27.881,38.4 28.3,38.4 ; R26.1@28.245,35.9 28.1,36.045 28.1,38.2 28.3,38.4 ; IC3.5 28.3,38.4
  Top Layer w0.3: IC3.5@29.028,38.522 IC3.5
  Bottom Layer w0.2: v2(16.8,42.4) 16.78,42.42 16.042,42.42 15.72,42.097 15.72,40.036 12.084,36.4 10.284,34.6 9.027,34.6 6.25,31.823 6.25,29.74 4.1,27.59 4.1,23.904 9.324,18.68 17.618,18.68 18.35,19.412 18.35,21.155 19.895,22.7 v2(20.2,22.7) ; v2(18.7,40.8) 25.4,40.8 v2(27.7,38.5)
NetP1_SWCLK: P1.SWCLK U1.37 | length 32.7
  Top Layer w0.2: P1.SWCLK 5.34,25.76 v2(5.4,25.7) ; v2(27.625,28.675) 27.683,28.732 27.863,28.732 28.63,29.5 28.85,29.72 28.85,29.791 28.924,29.865 28.952,29.865 28.975,29.889 U1.37
  Bottom Layer w0.2: v2(5.4,25.7) 5.4,25.5 5.6,25.3 5.6,24.522 6.272,23.85 8.322,21.8 12.357,21.8 14.957,24.4 20.295,24.4 20.945,25.05 24.145,28.25 27.35,28.25 27.568,28.468 27.568,28.617 v2(27.625,28.675)
NetP1_SWDIO: P1.SWDIO U1.34 | length 31.6
  Top Layer w0.2: v2(7.2,26.7) 7.2,27.8 P1.SWDIO ; v2(28.924,28.276) 29.56,28.276 29.586,28.25 U1.34
  Bottom Layer w0.2: v2(7.2,26.7) 7.2,23.97 8.97,22.2 12.262,22.2 14.812,24.75 20.15,24.75 24.625,29.225 27.853,29.225 28.744,28.334 28.866,28.334 v2(28.924,28.276)
NetP3_2: C30.2 C31.2 P3.2 R21.2 R22.2 | length 9.2
  Top Layer w0.3: R21.2 4.205,32.3 4.445,32.06 4.445,31.833 4.778,31.5 5.6,31.5 5.665,31.435 5.842,31.435 6.165,31.112 6.165,30 7,29.165 8.865,29.165 9.647,29.947 9.647,29.963 10.05,30.366 C31.2@10.05,30.6
  other v1: 9.3,28.3 10.1,28.3 9.3,29.1 10.1,29.1 42.6,36.4 43.5,36.4 42.6,37.3 43.5,37.3
NetP6_SCL: IC2.5 IC4.5 P6.SCL R5.2 U1.30 | length 69.1
  Top Layer w0.2: U1.30@30.225,26.25 31.375,26.25 v2(31.5,26.125) ; v1(38.6,45.4) IC4.5 ; v2(40.4,5.6) 40.994,6.194 40.994,6.539 R5.2 ; v1(43.1,27.2) 43.1,27.092 43.2,26.992 IC2.5
  Top Layer w0.3: R5.2 43.6,6.7 P6.SCL
  Bottom Layer w0.2: v1(38.6,45.4) 38.6,43.695 45.35,36.945 45.35,31.255 43.15,29.055 43.15,28.106 43.1,28.057 v1(43.1,27.2) 41.351,27.2 39.701,28.85 33.97,28.85 32.05,26.93 32.05,26.647 31.728,26.325 31.709,26.325 31.509,26.125 v2(31.5,26.125) 31.5,26.116 31.3,25.916 31.3,12.5 38.2,5.6 v2(40.4,5.6)
NetP6_SDA: IC2.4 IC4.4 P6.SDA R7.2 U1.31 | length 72.6
  Top Layer w0.2: U1.31@30.225,26.75 31.375,26.75 v2(31.5,26.875) ; v1(37,46.7) 37.059,46.7 37.259,46.9 IC4.4 ; v2(40.4,4.85) 41.055,4.195 41.055,3.9 R7.2 ; v1(41.6,27.8) 42.7,26.7 IC2.4
  Top Layer w0.3: R7.2 P6.SDA
  Bottom Layer w0.2: v1(37,46.7) 37,44.8 45,36.8 45,31.4 42.8,29.2 42.8,28.251 42.449,27.9 41.951,27.9 41.941,27.91 41.818,27.91 41.708,27.8 v1(41.6,27.8) 40.2,29.2 33.825,29.2 v2(31.5,26.875) 31.472,26.875 30.95,26.353 30.95,12.355 38.455,4.85 v2(40.4,4.85)
NetQ1_SCL: Q1.SCL R6.1 U1.45 | length 62.7
  Top Layer w0.2: v2(24.3,47.7) 24.3,48.54 Q1.SCL 23.8,49.1 25.2,50.5 27.245,50.5 R6.1 ; v2(24.802,32.7) 24.858,32.644 24.858,32.409 24.785,32.336 24.785,31.554 24.95,31.389 U1.45@24.95,30.525
  Bottom Layer w0.2: v2(24.3,47.7) 24.3,47.295 24.005,47 23.627,47 17.8,41.173 17.8,39.995 8.15,30.345 8.15,24.145 9.395,22.9 11.972,22.9 14.522,25.45 19.423,25.45 20.3,26.327 20.3,29.105 23.745,32.55 24.652,32.55 v2(24.802,32.7)
NetQ1_SDA: Q1.SDA R8.1 U1.46 | length 54.9
  Top Layer w0.2: v2(24.1,33.1) 24.1,33.043 24.252,32.891 24.252,31.592 24.45,31.394 U1.46@24.45,30.525 ; v2(25.3,47.8) 26.28,48.78 Q1.SDA 27.38,48 R8.1@27.945,48
  Bottom Layer w0.2: v2(24.1,33.1) 23.8,33.1 19.95,29.25 19.95,26.472 19.278,25.8 13.9,25.8 12.1,27.6 8.559,27.6 8.5,27.659 8.5,30.2 18.15,39.85 18.15,41.028 23.772,46.65 24.15,46.65 v2(25.3,47.8)
NetR9_1: R9.1 U1.44 | length 1.5
  Top Layer w0.2: U1.44@25.45,30.625 25.45,31.289 25.5,31.339 R9.1@25.5,32.145
NetR14_2: R14.2 R16.1 U2.A1 | length 26.1
  Top Layer w0.3: R14.2 v2(15.7,19.93) 15.7,19.4 18.85,16.25 18.85,14.114 19.464,13.5 25.5,13.5 27.6,11.4 27.6,9.251 28.363,8.488 28.363,8.025 28.863,7.525 U2.A1
  Bottom Layer w0.3: v2(15.7,19.93) 15.7,19.984 15.8,20.084 v2(15.8,23.75)
NetR15_2: R15.2 R17.1 U2.B1 | length 22.7
  Top Layer w0.3: v2(17.1,19.93) R15.2 19.3,18.345 19.3,14.3 19.5,14.1 25.8,14.1 27.3,12.6 29.025,12.6 U2.B1 ; v2(17.1,23.75) R17.1 R17.1@17.155,23.245
  Bottom Layer w0.3: v2(17.1,19.93) v2(17.1,23.75)
NetR22_1: R22.1 R23.2
NetR28_2: R28.2 U1.11 | length 68.7
  Top Layer w0.2: v2(16.27,41.87) 18.089,40.05 v2(18.7,40.05) ; v2(20.03,23.45) 20.695,23.45 21.495,24.25 U1.11@22.175,24.25 ; R28.2 v2(34.5,34.05)
  Bottom Layer w0.2: v2(16.27,41.87) 16.27,40.091 10.429,34.25 9.172,34.25 6.6,31.678 6.6,29.595 4.45,27.445 4.45,24.049 9.469,19.03 17.473,19.03 18,19.557 18,21.3 20.09,23.39 20.15,23.45 v2(20.03,23.45) ; v2(18.7,40.05) 25.25,40.05 31.25,34.05 v2(34.5,34.05)
NTC+: P4.2 R4.1 U1.19 U1.21 | length 52.3
  Top Layer w0.2: U1.19@26.45,22.475 26.45,21.6 26.375,21.525 26.375,18.325 27.75,16.95 31.639,16.95 31.903,16.686 31.903,14.892 33.545,13.25 38.695,13.25 R4.1 ; U1.21@27.45,22.475 27.45,21.523 27.05,21.123 27.05,18.355 27.955,17.45 31.655,17.45 32.25,16.855 32.25,16.25 33.1,15.4 33.616,15.4 33.626,15.41 37.895,15.41 38.105,15.2 40.4,15.2 41.6,16.4 41.6,18.6 41.7,18.7 42.7,18.7 43.4,18 43.4,17.5 P4.2
  Top Layer w0.3: R4.1 39.445,14 40.1,14 42.438,16.338 42.438,16.55 43.288,17.4 P4.2
NTC-: C19.2 C20.2 C21.2 C22.2 C23.2 C24.2 L2.2 P4.1 U1.8 U1.22 U1.23 U4.1 U4.3 | length 49.7
  Top Layer w0.2: C20.2@19.15,25.15 19.835,25.835 21.059,25.835 21.144,25.75 22.175,25.75 24.35,25.75 v2(24.4,25.7) ; U1.22@27.95,22.475 27.95,21.528 27.4,20.978 27.4,18.5 28.1,17.8 31.8,17.8 32.6,17 32.6,16.395 33.2,15.795 38.005,15.795 38.25,15.55 40.255,15.55 41.25,16.545 41.25,18.745 41.555,19.05 42.7,19.05 43.4,19.75 P4.1@43.4,20.3 ; U1.23@28.45,22.575 28.45,23.65 v2@28.5,23.7
  Top Layer w0.3: v2@28.5,23.7 v2(28.676,23.876) 28.714,23.838 28.863,23.838 29.6,23.101 29.6,21.15 30.065,20.685 30.065,20.674 30.389,20.35 C23.2 ; v1(41.2,19.7) 42.8,19.7 43.4,20.3 P4.1
  Bottom Layer w0.3: v2(24.4,25.7) 26.852,25.7 v2(28.676,23.876) ; v1(36.05,19.2) 36.1,19.2 36.6,19.7 v1(41.2,19.7)
OSC_IN: C1.1 U1.5 Y1.1 | length 12.1
  Top Layer w0.2: C1.1@12.65,28 12.65,28.05 13.775,29.175 14.543,29.175 Y1.1@15.068,29.7 ; Y1.1@14.968,29.8 16.919,29.8 17.019,29.9 v2(17.1,29.9) ; v2(19.4,27) 19.405,27 19.705,27.3 21.44,27.3 21.465,27.275 21.486,27.275 21.511,27.25 U1.5@22.175,27.25
  Bottom Layer w0.2: v2(17.1,29.9) 17.1,29.3 v2(19.4,27)
OSC_OUT: R11.1 U1.6 | length 12.2
  Top Layer w0.2: R11.1 15.395,31.25 15.843,31.25 16.303,30.791 v2(16.635,30.791) ; U1.6@22.175,26.75 22.165,26.76 21.418,26.76 21.228,26.95 20.128,26.95 19.478,26.3 19,26.3 v2(18.9,26.4) ; v2(18.9,26.4) 19,26.5 v2(18.9,26.4)
  Bottom Layer w0.2: v2(16.635,30.791) 16.586,30.791 ccw(c20.139,30.791) 16.634,30.211 16.55,30.128 16.55,29.355 17.623,28.282 ccw(c20.139,30.791) 17.627,28.278 18.8,27.105 18.8,26.581 18.9,26.481 v2(18.9,26.4)
PushButton: C6.1 R12.2 S1.2 U1.14 | length 32
  Top Layer w0.2: R12.2 3.095,14.945 C6.1 3.1,13.2 3.8,12.5 8.85,12.5 9.408,11.942 9.408,11.8 9.758,11.45 S1.2 9.9,15.2 v2(11.9,17.2) ; v2(22.6,21.3) 23.7,21.3 23.95,21.55 U1.14@23.95,22.475
  Bottom Layer w0.2: v2(11.9,17.2) 12.3,17.6 18.407,17.6 22.107,21.3 v2(22.6,21.3)
TEC1_Shunt+: C30.1 C31.1 IC2.8 IC2.10 L3.2 R20.1 | length 9.8
  Top Layer w0.2: v1(39.4,30.8) 39.085,31.115 R20.1 39.206,31.779 39.621,31.779 39.85,31.55 39.85,31.15 40.715,30.285 41.15,30.285 41.2,30.235 IC2.10 ; v1(42.2,28.5) IC2.8
  Bottom Layer w0.2: v1(39.4,30.8) 41.7,28.5 v1(42.2,28.5)
TEC1_Shunt-: IC2.9 P3.1 R20.2 | length 3.5
  Top Layer w0.2: R20.2 40.694,31.679 40.379,31.679 40.2,31.5 40.2,31.295 40.86,30.635 41.407,30.635 41.656,30.386 41.656,29.844 IC2.9
TEC2_shunt+: C38.1 C39.1 IC4.8 IC4.10 L4.2 R24.1 R25.1 | length 15.8
  Top Layer w0.2: R24.1@41.54,44.46 41.54,44.722 41.502,44.76 R24.1@41.5,44.76 ; v1@41.683,48.083 41.776,48.176 41.834,48.176 42.057,48.4 IC4.10 ; v1(42.4,44.9) 41.64,44.9 R24.1@41.5,44.76 ; IC4.8 41.8,47.4 41.5,47.1 R24.1@41.5,44.76
  Top Layer w0.3: R25.1@35.972,33.473 R25.1 37.736,33.545 37.916,33.365 39.495,33.365 40.35,34.22 C38.1 ; L4.2@39.8,40.5 L4.2
  Bottom Layer w0.2: v1(41.6,48.1) 42.3,48.1 42.6,47.8 42.6,45.159 42.4,44.959 v1(42.4,44.9)
TEC2_shunt-: IC4.9 P5.1 R24.2 | length 5.9
  Top Layer w0.2: IC4.9 v1(44,47.9) ; v1(43.3,44.9) R24.2@43.96,44.9
  Bottom Layer w0.2: v1(43.3,44.9) 43.019,45.181 43.019,47.719 43.2,47.9 v1(44,47.9)
VDDSD: C19.1 C20.1 C21.1 C22.1 L1.2 R19.2 U1.9 U1.24 | length 32.1
  Top Layer w0.2: C20.1@20.65,25.1 20.79,25.24 23.382,25.24 23.472,25.15 23.601,25.15 23.793,24.958 23.9,25.065 v2(23.9,25.1) ; C21.1@28.95,21.1 U1.24@28.95,22.475 ; R19.2@34.776,22.279 35.2,21.855 35.2,21.651 35.8,21.051 35.8,20.75 C19.1 ; 37.7,18.215 C19.1@37.7,18.806
  Top Layer w0.4: 33.4,16.6 33.474,16.6 33.584,16.49 35.616,16.49 35.626,16.5 36.5,16.5
  Top Layer w0.5: C21.1@28.8,21.05 ccw(c28.679,20.929) 28.679,21.1 28.6,21.1 v2(28.1,20.6) 27.915,20.415 27.915,18.885 28.2,18.6 31.9,18.6 33.1,17.4 33.1,16.9 33.4,16.6 ; 36.5,16.5 37.65,17.65 C22.1
  Bottom Layer w0.3: v2(23.9,25.1) v2@23.997,25.1 ; v2@23.997,25.1 26.5,25.1 28.1,23.5 v2(28.1,20.6)
Vin: C8.1 C9.1 C10.1 C25.1 C27.1 C28.1 C29.1 C35.1 C36.1 C37.1 IC1.3 IC3.3 P2.2 U3.3 | length 59.1
  Top Layer w0.5: P2.2@3.1,40.9 2.804,40.604 2.804,40.396 3.2,40 3.8,40 v2(4.4,39.4) ; v2(34.4,29.8) 35.15,29.8 C9.1
  Bottom Layer w0.5: v2(4.4,39.4) 4.4,28.597 3.6,27.797 3.6,23.697 9.117,18.18 9.22,18.18 9.3,18.1 18.2,18.1 23.2,23.1 23.2,25.49 24.11,26.4 28.3,26.4 31.7,29.8 v2(34.4,29.8)
pads on no net: IC2.3 IC4.3 Q1.2 S1.3 S1.4 S2.3 S2.4 U1.16 U1.20 U1.26 U1.27 U1.28 U1.29 U1.32 U1.33 U1.35 U1.36 U1.38 U1.39 U1.40 U1.41 U1.42 U1.43 U2.6 U2.7 U2.8 U2.9 U2.10 U2.11 U2.12

## Polygon pours and split planes (outlines as drawn)
GND on Top Layer "GND_L01_P060" (solid, pour order 60): 46.981,52.975 46.981,-0.025 -0.019,-0.025 -0.019,52.975
NTC- on Top Layer "NTC-_L01_P014" (solid, pour order 14): 28.3,19 32,19 34,17 36.4,17 36.4,19.9 36,20.3 32.6,20.3 32.1,20.8 30,20.8 29.3,20.1 28.3,20.1
ADC_RES+ on Top Layer "Top Layer-ADC_RES+" (solid, pour order 58): 30.1,21.4 32.2,21.4 32.5,21.1 32.5,20.6 33.6,20.6 33.8,20.4 35.4,20.4 35.4,21.2 34.9,21.2 33.6,22.5 33.6,22.9 ccw(c33.4,22.9) 33.4,23.1 32.9,23.1 ccw(c32.9,22.7) 32.5,22.7 cw(c32.2,22.7) 32.2,22.4 30.1,22.4 ccw(c30.1,22.2) 29.9,22.2 29.9,21.6 ccw(c30.1,21.6)
VDDSD on Top Layer "VDDSD_L01_P056" (solid, pour order 56): 36.8,19.3 37.9,19.3 37.9,18.3 38.5,17.7 40.7,17.7 40.7,16 36.8,16
Vin on Top Layer "VIN_L01_P040" (solid, pour order 40): 7.1,42.1 9.5,44.5 12.2,47.2 32,47.2 32.5,46.7 32.5,45.1 32.2,44.8 27.7,44.8 26.2,43.3 11.8,43.3 11.5,43 11.5,40.9 10,39.4 6.4,39.4 6.4,42.1
TEC2_shunt- on Top Layer "TEC2_SHUNT-_L01_P053" (solid, pour order 53): 43.6,45.9 43.6,43.2 45,43.2 45,45.9
TEC2_shunt+ on Top Layer "TEC2_SHUNT+_L01_P024" (solid, pour order 24): 38.4,42.3 38.4,38.2 39.7,36.9 39.7,33.6 41.1,33.6 41.1,36.7 42.5,38.1 44.9,38.1 44.9,40.4 44.7,40.6 41.7,40.6 41.3,41 41.3,42.3
TEC1_Shunt- on Top Layer "TEC1_SHUNT-_L01_P055" (solid, pour order 55): 41.9,31 41.7,31.2 40.7,31.2 40.4,31.5 40.4,33 41.9,33
TEC2_shunt+ on Top Layer "TEC2_SHUNT+_L01_P052" (solid, pour order 52): 38.4,42.3 38.4,44.4 39.8,45.8 42,45.8 42,43 41.3,42.3
TEC1_Shunt+ on Top Layer "TEC1_SHUNT+_L01_P049" (solid, pour order 49): 22.33,36.87 26.3,32.9 26.3,32.7 27.3,31.7 29,31.7 30.7,30 39.621,30 39.621,33.3 30.6,33.3 28.8,35.1 27.7,35.1 27.5,35.3 27.5,37.1 26.8,37.8 25.7,37.8
NetP3_2 on Top Layer "NETP3_2_L01_P000" (solid, pour order 0): 41.1,37 41.76,37 42.66,37.9 44.7,37.9 45,37.6 45,34.1 44.9,34 41.1,34
no net on Top Layer "NONET_L01_P050" (solid, pour order 50): 0.7,52.7
Vin on Top Layer "VIN_L01_P021" (solid, pour order 21): 34.7,30.3 34.7,29.3 ccw(c35,29.3) 35,29 37.7,29 cw(c37.7,28.8) 37.9,28.8 ccw(c38.1,28.8) 38.1,28.6 39.3,28.6 cw(c39.3,28.4) 39.5,28.4 39.5,26.5 cw(c38.9,26.5) 38.9,25.9 ccw(c38.9,25.7) 38.7,25.7 38.7,25 ccw(c38.8,25) 38.8,24.9 40.8,24.9 ccw(c40.8,25) 40.9,25 40.9,30.3
NetC26_2 on Top Layer "NETC26_2_L01_P036" (solid, pour order 36): 9.8,36.1 8.8,36.1 8.8,38.455 11.6,41.255 11.6,43.2 15.7,43.2 15.8,43.1 15.8,37.7 15.7,37.6 11.8,37.6 11.4,38 10,38 9.8,37.8
NetC40_2 on Top Layer "NETC40_2_L01_P044" (solid, pour order 44): 30.5,34.5 36.6,34.5 36.6,35.6 36.5,35.7 30.7,35.7 30.5,35.5
NetP3_2 on Top Layer "NETP3_2_L01_P039" (solid, pour order 39): 10.6,33.5 10.8,33.3 10.8,29.4 10.5,29.1 10.5,28 10.3,27.8 9.1,27.8 9,27.9 9,31.6 8.4,31.6 7.9,32.1 7.9,33.3 8.1,33.5
TEC1_Shunt+ on Top Layer "TEC1_SHUNT+_L01_P037" (solid, pour order 37): 11.1,29.7 11.1,33.4 11.4,33.7 12.6,33.7 20.4,41.5 20.4,43.1 20.6,43.3 25.4,43.3 25.7,43 25.7,37.8 24.9,37 23.8,37 19.7,32.9 14.2,32.9 13.1,31.8 13.1,29.7
Vin on Top Layer "VIN_L01_P001" (solid, pour order 1): 1.3,42.1 6.1,42.1 10,42.1 10,39.8 8.8,38.6 8.8,36.1 6.5,36.1 5.7,35.3 4.6,35.3 4.6,38.5 3.5,39.6 1.3,39.6
NetR22_1 on Top Layer "NETR22_1_L01_P035" (solid, pour order 35): 6,33.5 7.2,33.5 7.6,33.1 7.6,32 8.2,31.4 8.7,31.4 9,31.1 9,29.4 8.8,29.2 7.9,29.2 6.6,30.5 6.6,31.3 5.9,32 5.9,33.4
no net on Top Layer "NONET_L01_P029" (solid, pour order 29): 9.8,36
NetC34_2 on Top Layer "NETC34_2_L01_P023" (solid, pour order 23): 32.4,38.8 32.7,39.1 32.7,42.2 35.3,42.2 35.4,42.1 35.4,38.8 34.7,38.1 30.8,38.1 30.8,38.8
3V3 on Top Layer "3V3_L01_P013" (solid, pour order 13): 36.3,24.6 38.6,24.6 40.3,22.9 40.3,18.7 38.9,18.7 37.6,20 37.6,23 36.8,23.8 36.3,23.8
Vin on Top Layer "VIN_L01_P011" (solid, pour order 11): 32.2,45.5 32.2,39.8 32.4,39.6 32.4,38.9 30.7,38.9 30.7,45.5
GND on Bottom Layer "GND_L02_P051" (solid, pour order 51): 0,53 47,53 47,0 0,0
NetP3_2 on Bottom Layer "NETP3_2_L02_P046" (solid, pour order 46): 8.9,30.2 16.1,37.4 26.3,37.4 30.6,33.1 36.8,33.1 41.6,37.9 44.7,37.9 45,37.6 45,33.8 44.7,33.5 42.7,33.5 39.4,30.2 28.9,30.2 24.8,34.3 17.2,34.3 12.1,29.2 10.6,29.2 10.4,29 10.4,27.9 10.3,27.8 9.1,27.8 8.9,28

## Silkscreen, mask and mechanical layers (free items; w line width, h text height)
Top Overlay:
  text "Peltier Temperature Controller" at 0.7,51.578 h1
  text "Vin" at 2.05,45.85 h0.8
  text "TPS565201" at 46.002,42.3 h0.8 r90
  text "5A" at 46.25,40.25 h0.8 r90
  text "1.5A" at 46.15,32.65 h0.8 r90
  text "TPS54201" at 46.099,28.5 h0.8 r90
  text "SWDIO" at 2.88,28.28 h0.8
  text "SWCLK" at 0.78,26.68 h0.8
  text "3V3" at 4.18,22.78 h0.8
  text "GND" at 0.68,21.78 h0.8
  text "-" at 44.254,21.654 h0.8
  text "SWD" at 5.7,19.3 h0.8
  text "NTC" at 46.35,17.75 h0.8 r90
  text "+" at 44.254,14.821 h0.8
  text "BMP280" at 40.3,1 h0.8
Mechanical 1:
  the board outline again, w0.1

## Text inside footprints (layer, text, board x,y; h text height)
P6: Top Overlay "SCL" at 46.25,2.95 h0.8 r90; Top Overlay "SDA" at 46.25,5.75 h0.8 r90; Top Overlay "3V3" at 46.25,8.95 h0.8 r90; Top Overlay "GND" at 46.25,11.65 h0.8 r90
Q1: Top Overlay "GND" at 19.215,43.316 h0.8 r90; Top Overlay "VCC" at 21.882,43.443 h0.8 r90; Top Overlay "SCL" at 24.295,43.443 h0.8 r90; Top Overlay "SDA" at 26.92,43.28 h0.8 r90